# Allegro board tc358870_demo.brd
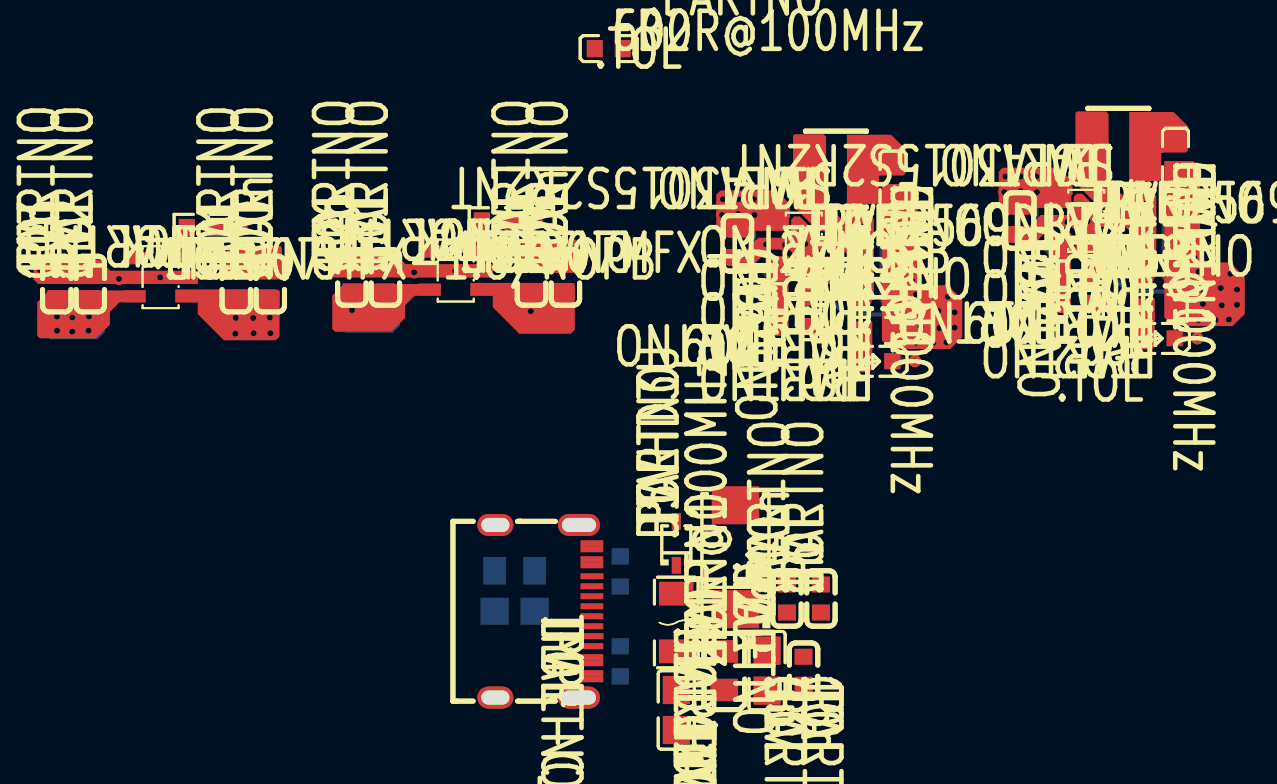
[diagram p0: board, top side]
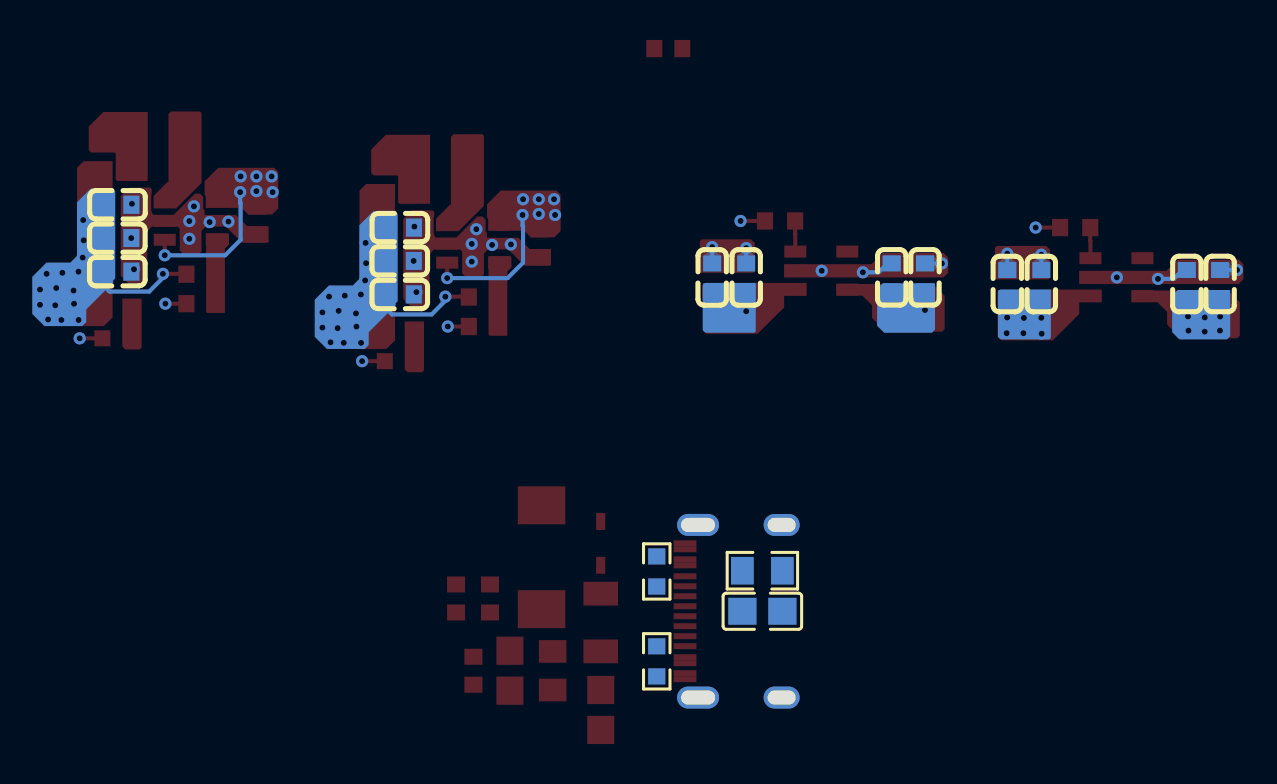
[diagram p1: board, bottom side, seen from below]

No outline. copper layers: TOP, GND, PWOER, BOTTOM. Coordinates in mm from the lowest, leftmost part position.

## Design rules (mm)
constraint set DEFAULT: min track width 0.203
net group MIPI_DIS1: nets MIPI_DSI1_CLK_N MIPI_DSI1_CLK_P MIPI_DSI1_DATA0_N MIPI_DSI1_DATA0_P MIPI_DSI1_DATA1_N MIPI_DSI1_DATA1_P MIPI_DSI1_DATA2_N MIPI_DSI1_DATA2_P MIPI_DSI1_DATA3_N MIPI_DSI1_DATA3_P
net group MIPI_DSI0: nets MIPI_DSI0_CLK_N MIPI_DSI0_CLK_P MIPI_DSI0_DATA0_N MIPI_DSI0_DATA0_P MIPI_DSI0_DATA1_N MIPI_DSI0_DATA1_P MIPI_DSI0_DATA2_N MIPI_DSI0_DATA2_P MIPI_DSI0_DATA3_N MIPI_DSI0_DATA3_P

## Placement (name value [footprint] x y rotation side)
C1  4u7  [C0805]  30.98 0 270 top
C2  47uF  [CASE-C]  33.94 7.65 270 top
C3  4u7  [C0805]  35.52 1.97 270 top
C4  100n  [C0603]  36.51 5.58 90 top
C5  10n  [C0603]  37.34 1.97 270 top
C6  1n  [C0603]  38.21 5.58 90 top
C7  4u7  [C0805]  22.9 4.94 180 bottom
C8  1n  [C0603]  8.95 21.32 90 bottom
C9  10n  [C0603]  10.65 21.32 90 bottom
C10  100n  [C0603]  10.68 21.32 90 top
C11  10u  [C0603]  8.98 21.32 90 top
C12  1n  [C0603]  1.68 21.32 90 top
C13  10n  [C0603]  0 21.32 90 top
C14  100n  [C0603]  1.67 21.33 90 bottom
C15  10u  [C0603]  0.01 21.33 90 bottom
C16  4u7  [C0603]  34.04 23.36 270 top
C17  1n  [C0603]  41.03 24.16 180 top
C18  10n  [C0603]  41.03 22.48 180 top
C19  100n  [C0603]  41.03 20.8 180 top
C20  10u  [C0603]  41.02 24.15 180 bottom
C21  10u  [C0603]  41.03 22.48 180 bottom
C22  22u  [C0603]  41.03 20.8 180 bottom
C23  10n  [C0603]  25.41 21.65 90 bottom
C24  100n  [C0603]  25.44 21.65 90 top
C25  10u  [C0603]  23.73 21.65 90 top
C26  10n  [C0603]  14.76 21.65 90 top
C27  100n  [C0603]  16.43 21.66 90 bottom
C28  10u  [C0603]  14.77 21.66 90 bottom
C29  4u7  [C0603]  48.16 24.5 270 top
C30  1n  [C0603]  23.7 21.65 90 bottom
C31  1n  [C0603]  16.43 21.65 90 top
C32  1n  [C0603]  55.15 25.3 180 top
C33  10n  [C0603]  55.15 23.62 180 top
C34  100n  [C0603]  55.15 21.94 180 top
C35  10u  [C0603]  55.14 25.29 180 bottom
C36  10u  [C0603]  55.15 23.62 180 bottom
C37  22u  [C0603]  55.15 21.94 180 bottom
D1  H5VHD3U  [SOD-323]  30.98 8.34 90 top
F1  SMD1206-100-30  [PTC1206]  30.98 4.38 270 top
FB1  220R@100MHz  [FB0805]  33.38 1.97 90 top
FB2  600R@100MHz  [FB0603]  27.6 33.11 0 top
FB3  600R@100MHz  [FB0603]  41.82 26.55 270 top
FB4  600R@100MHz  [FB0603]  55.94 27.7 270 top
L1  SWPA3015S2R2NT  [SMD3015]  38.96 27.07 180 top
L2  SWPA3015S2R2NT  [SMD3015]  53.09 28.21 180 top
LED1  Red  [LED0603]  41.03 17.46 180 top
LED2  Red  [LED0603]  55.15 18.6 180 top
R1  1M  [R0805]  22.9 6.97 180 bottom
R2  5K11  [R0603]  28.18 6.94 90 bottom
R3  5K11  [R0603]  28.18 2.43 270 bottom
R4  10K  [R0603]  7.25 24.15 180 top
R5  41K2  [R0603]  36.82 20.67 0 top
R6  1K  [R0603]  41.02 18.99 180 top
R7  9K09  [R0603]  36.82 19.2 180 top
R8  10K  [R0603]  22.01 24.48 180 top
R9  7K68  [R0603]  50.94 21.82 0 top
R10  1K  [R0603]  55.14 20.14 180 top
R11  9K09  [R0603]  50.94 20.34 180 top
U1  TYPE-C_16PIN  [TYPEC_16PIN]  24.35 4.94 270 top
U2  TLV62569DBV  [SOT-23-5]  37.36 23.34 0 top
U3  LP5907MFX-1.8/NOPB  [SOT-23-5]  5.19 21.67 0 top
U4  TLV62569DBV  [SOT-23-5]  51.48 24.49 0 top
U5  LP5907MFX-1.2/NOPB  [SOT-23-5]  19.95 22 0 top

## Library data of the parts
C1 C3-C37 = CAP_NP: Tolerance: .TOL; User Part Number: .PARTNO
C2 = CAP_TANTALUM: Tolerance: .TOL; User Part Number: .PARTNO
D1 = TVS/ESD: Tolerance: .TOL; User Part Number: .PARTNO
F1 = Fuse: Tolerance: .TOL; User Part Number: .PARTNO
FB1-FB4 = FerriteBead: Tolerance: .TOL; User Part Number: .PARTNO
L1 L2 = Inductor: Tolerance: .TOL; User Part Number: .PARTNO
LED1 LED2 = LED: Tolerance: .TOL; User Part Number: .PARTNO
R1-R11 = Res: Tolerance: .TOL; User Part Number: .PARTNO
U1 = TYPEC_16PIN: Tolerance: .TOL; User Part Number: .PARTNO
U2 U4 = TLV62569DBV: Tolerance: .TOL; User Part Number: .PARTNO
U3 U5 = LP5907MFX: Tolerance: .TOL; User Part Number: .PARTNO

## Footprints (pads in the part's own frame, mm; a bottom-side part is the same pattern mirrored in y, then rotated)
C0603
  rect 0.8x0.9 smd: 1(-0.7,0) 2(0.7,0)
C0805
  rect 1.41x1.35 smd: 1(-1,0) 2(1,0)
CASE-C
  rect 1.9x2.376 smd: 1(2.6,0) 2(-2.6,0)
FB0603
  rect 0.8x0.864 smd: 1(-0.7,0) 2(0.7,0)
FB0805
  rect 1.133x1.377 smd: 1(-0.966,0) 2(0.966,0)
LED0603
  rect 0.8x0.8 smd: 1(-0.749,0) 2(0.749,0)
PTC1206
  rect 1.19x1.728 smd: 1(-1.445,0) 2(1.445,0)
R0603
  rect 0.806x0.864 smd: 1(-0.753,0) 2(0.753,0)
R0805
  rect 1.133x1.377 smd: 1(-1,0) 2(1,0)
SMD3015
  rect 1.5x3.32 smd: 1(1.328,0) 2(-1.328,0)
SOD-323
  rect 0.845x0.455 smd: 1(-1.098,0) 2(1.098,0)
SOT-23-5
  rect 1.1x0.6 smd: 1(1.3,-0.95) 2(1.3,0) 3(1.3,0.95) 4(-1.3,0.95) 5(-1.3,-0.95)
TYPEC_16PIN
  oval 1.1x1.8 hole 0.7x1.4: 1(-4.32,-2.416) 3(4.32,-2.416)
  oval 1.1x2.1 hole 0.7x1.7: 2(-4.32,1.764) 4(4.32,1.764)
  rect 0.3x1.14 smd: A1(-3.4,2.415) A4(-2.6,2.415) A5(-1.25,2.415) A6(-0.25,2.415) A7(0.25,2.415) A8(1.25,2.416) A9(2.6,2.415) A12(3.4,2.415) B1(3.1,2.415) B4(2.3,2.415) B5(1.75,2.415) B6(0.75,2.415) B7(-0.75,2.415) B8(-1.75,2.416) B9(-2.3,2.415) B12(-3.1,2.415)

## Nets
GND: C12.2 C13.2 C14.2 C15.2 C26.2 C27.2 C28.2 C31.2 FB2.2 U3.2 U5.2
PGND: C1.2 C2.2 C3.2 C4.2 C5.2 C6.2 C7.1 C8.2 C9.2 C10.2 C11.2 C16.2 C17.2 C18.2 C19.2 C20.2 C21.2 C22.2 C23.2 C24.2 C25.2 C29.2 C30.2 C32.2 C33.2 C34.2 C35.2 C36.2 C37.2 D1.2 FB2.1 LED1.1(CATHODE) LED2.1(CATHODE) R1.1 R2.2 R3.2 R7.1 R11.1 U1.A1 U1.A12 U1.B1 U1.B12 U2.2 U4.2
VCC_1V1: C32.1 C33.1 C34.1 C35.1 C36.1 C37.1 FB4.2 R9.2 R10.1
VCC_1V2: C26.1 C27.1 C28.1 C31.1 U5.5(OUT)
VCC_1V8: C12.1 C13.1 C14.1 C15.1 U3.5(OUT)
VCC_3V3: C8.1 C9.1 C10.1 C11.1 C17.1 C18.1 C19.1 C20.1 C21.1 C22.1 C23.1 C24.1 C25.1 C30.1 FB3.2 R4.1 R5.2 R6.1 R8.1 U3.1 U5.1
VCC_5V: C2.1 C3.1 C4.1 C5.1 C6.1 C16.1 C29.1 FB1.2 U2.1 U2.4(VIN) U4.1 U4.4(VIN)
N236681: D1.1(CATHODE) F1.1 U1.A4 U1.A9 U1.B4(VBUS_3) U1.B9
N236693: C1.1 F1.2 FB1.1
N236737: C7.2 R1.2 U1.1 U1.2 U1.3 U1.4
N236965: R2.1 U1.A5
N237015: R3.1 U1.B5
N238261: L1.1 U2.3
N238489: R5.1 R7.2 U2.5
N242953: L2.1 U4.3
N243181: R9.1 R11.2 U4.5
N2381410: FB3.1 L1.2
N2382151: LED1.2 R6.2
N2390621: R4.2 U3.3
N2428410: FB4.1 L2.2
N2429111: LED2.2 R10.2
N2437651: R8.2 U5.3

Pads without a net: U1 A6 A7 A8 B6 B7 B8; U3 4; U5 4

## Via types
v1: diameter 0.61, hole 0.305, TOP to BOTTOM, 92 vias

## Routing (per net, layer and track width the routed paths; a pad name or vN(x,y) marks a point on that pad's centre or on a via; arc(x,y) is an arc through that point)
GND: length 7.6
  TOP w0.203: v1(19.93,21.99) 19.94,22 U5.2 ; U3.2 5.18,21.67 v1(5.17,21.66)
  BOTTOM w0.203: C27.2 16.64,22.36 17.08,21.91 v1(17.87,21.91) ; C28.2 v1(13.92,22.36) ; C15.2 v1(-0.84,22.03) ; v1(3.11,21.58) 2.33,21.58 1.88,22.03 C14.2
PGND: length 11.7
  TOP w0.203: v1(37.43,23.33) 37.44,23.34 U2.2 ; v1(10.65,22.84) 10.68,22.81 C10.2 ; v1(25.41,23.17) 25.44,23.14 C24.2 ; R11.1 v1(52.75,20.34) ; U4.2 51.56,24.49 v1(51.55,24.48) ; LED2.1 v1(57.03,18.6) ; LED1.1 v1(42.91,17.46) ; R7.1 v1(38.63,19.2)
  BOTTOM w0.203: C8.2 v1(8.95,22.79) ; C9.2 v1(10.65,22.84) ; C18.2 v1(40.34,22.48) ; C23.2 v1(25.41,23.17) ; C30.2 v1(23.7,23.12) ; C33.2 v1(54.46,23.62)
  vias: v1(35.47,23.31) v1(36.41,23.28) v1(37.2,24.07) v1(37.43,22.44) v1(40.2,20.92) v1(40.3,24.2) v1(49.59,24.45) v1(50.53,24.42) v1(51.32,25.21) v1(51.55,23.59) v1(54.32,22.06) v1(54.42,25.34)
VCC_1V1: length 6.7
  TOP w0.203: R9.2 51.72,21.83 v1(52.87,21.83)
  BOTTOM w0.203: v1(57.1,21.94) C34.1 55.85,21.26 55.54,20.94 53.56,20.94 52.87,21.63 v1(52.87,21.83)
  vias: v1(56.86,24.53) v1(56.83,23.51) v1(56.88,22.65) v1(57.09,19.52) v1(57.32,20.34) v1(57.34,21) v1(57.9,21.88) v1(57.95,19.52) v1(58.21,21.12) v1(58.26,20.26) v1(58.61,19.55) v1(58.69,21.83) v1(59.02,21.05) v1(59.02,20.28)
VCC_1V2: length 0.9
  BOTTOM w0.203: C28.1 v1(14.77,20.02)
VCC_1V8: length 0.9
  BOTTOM w0.203: C15.1 v1(0.01,19.69)
  vias: v1(0.01,18.99) v1(0.78,19.65) v1(0.78,18.94) v1(1.61,19.7) v1(1.59,18.99)
VCC_3V3: length 11.1
  TOP w0.203: v1(38.75,20.69) 37.59,20.69 R5.2 ; R4.1 v1(9.23,24.15) ; R8.1 v1(23.99,24.48)
  BOTTOM w0.203: C30.1 v1(23.7,19.96) ; v1(42.97,20.8) C19.1 41.73,20.11 41.42,19.8 39.43,19.8 38.75,20.49 v1(38.75,20.69) ; C8.1 v1(8.95,19.63)
  vias: v1(8.93,18.84) v1(9.82,19.62) v1(9.84,18.86) v1(10.66,19.65) v1(10.68,18.86) v1(42.71,22.37) v1(42.74,23.38) v1(42.76,21.5) v1(42.97,18.38) v1(43.22,19.85) v1(43.19,19.19) v1(43.78,20.74) v1(43.83,18.38) v1(44.08,19.98) v1(44.13,19.12) v1(44.49,18.4) v1(44.57,20.69) v1(44.9,19.9) v1(44.9,19.14)
VCC_5V: length 15.1
  TOP w0.203: 47.28,26.91 47.28,26.86 v1(47.44,26.71) ; U4.1 v1(52.78,22.76) ; v1(33.31,25.57) 33.16,25.72 33.16,25.77 ; U2.1 v1(38.66,21.62)
  BOTTOM w0.203: v1(52.78,22.76) 49.76,22.76 48.99,23.54 48.99,25.36 49.01,25.39 v1(49.01,25.92) ; v1(34.89,24.78) 34.89,24.25 34.86,24.22 34.86,22.39 35.63,21.62 v1(38.66,21.62)
  vias: v1(33.26,24.78) v1(34.08,25.57) v1(34.08,24.83) v1(34.86,25.57) v1(47.38,25.92) v1(48.2,26.71) v1(48.2,25.97) v1(48.99,26.71)
N2390621: length 1.5
  TOP w0.203: U3.3 6.49,23.48 6.5,23.49 R4.2
N2437651: length 1.5
  TOP w0.203: U5.3 21.25,23.81 21.26,23.82 R8.2

## Copper pours and planes (outline as drawn; the poured copper is in the pictures)
GND on TOP (solid shape): 2.68,21.99 7.02,21.99 7.05,21.96 7.05,21.33 -0.93,21.33 -1.15,21.55 -1.15,22.32 -0.93,22.54 2.12,22.54
GND on TOP (solid shape): 17.44,22.32 21.78,22.32 21.81,22.29 21.81,21.66 13.83,21.66 13.6,21.88 13.6,22.65 13.83,22.88 16.88,22.88
PGND on TOP (solid shape): 11.27,23.13 11.27,21.61 11.22,21.55 8.57,21.55 8.52,21.61 8.52,23.05 8.7,23.23 11.16,23.23
PGND on TOP (solid shape): 26.02,23.46 26.02,21.94 25.97,21.88 23.33,21.88 23.28,21.94 23.28,23.38 23.46,23.56 25.92,23.56
PGND on TOP (solid shape): 40.86,24.58 40.86,20.59 40.45,20.18 39.82,20.18 39.54,20.46 39.54,22.82 39.31,23.05 38.01,23.05 37.91,22.95 37.91,21.86 37.76,21.71 36.92,21.71 36.82,21.81 36.82,22.85 36.62,23.05 35.6,23.05 34.79,22.24 33.52,22.24 33.47,22.29 33.47,23.05 33.49,23.08 34.53,23.08 35.09,23.64 36.67,23.64 36.67,23.88 36.69,23.89 36.72,23.94 36.73,23.99 36.73,24.54 36.89,24.7 37.15,24.7 38.22,23.64 39.21,23.64 39.31,23.74 39.31,23.84 39.33,23.84 39.33,23.99 39.33,24.59 39.33,24.65 39.31,24.68 39.31,24.93 39.38,25.01 40.43,25.01
PGND on TOP (solid shape): 54.98,25.72 54.98,21.73 54.57,21.33 53.94,21.33 53.66,21.61 53.66,23.97 53.43,24.2 52.13,24.2 52.03,24.09 52.03,23 51.88,22.85 51.04,22.85 50.94,22.95 50.94,23.99 50.74,24.2 49.72,24.2 48.91,23.38 47.64,23.38 47.59,23.43 47.59,24.2 47.61,24.22 48.65,24.22 49.21,24.78 50.79,24.78 50.79,25.02 50.81,25.04 50.84,25.08 50.86,25.14 50.86,25.69 51.02,25.85 51.27,25.85 52.34,24.78 53.33,24.78 53.43,24.88 53.43,24.98 53.46,24.98 53.46,25.14 53.46,25.74 53.46,25.8 53.43,25.82 53.43,26.08 53.51,26.15 54.55,26.15
VCC_1V1 on TOP (solid shape): 57.16,27.14 57.16,22.72 57.49,22.39 58.69,22.39 59.4,21.68 59.4,19.83 58.79,19.22 55.82,19.22 55.39,19.65 55.39,27.47 56.83,27.47
VCC_1V1 on BOTTOM (solid shape): 57.16,25.42 57.16,22.72 57.49,22.39 58.69,22.39 59.4,21.68 59.4,19.83 58.79,19.22 56.91,19.22 56.71,19.42 56.71,20.06 55.36,21.4 55.36,21.5 55.26,21.61 55.26,25.97 55.39,26.1 56.48,26.1
VCC_1V2 on TOP (solid shape): 19.19,20.77 19.17,20.74 17.9,20.74 17.41,20.26 17.41,19.62 16.73,18.94 13.91,18.94 13.78,19.07 13.78,20.74 14.36,21.33 19.19,21.33
VCC_1V2 on BOTTOM (solid shape): 17.16,21.07 17.16,19.24 16.8,18.89 14.42,18.89 14.26,19.04 14.26,21.35 16.88,21.35
VCC_1V8 on TOP (solid shape): 4.43,20.44 4.41,20.41 3.14,20.41 2.66,19.93 2.66,19.29 1.97,18.61 -0.85,18.61 -0.98,18.73 -0.98,20.41 -0.39,21 4.43,21
VCC_1V8 on BOTTOM (solid shape): 2.4,20.74 2.4,18.91 2.05,18.56 -0.34,18.56 -0.49,18.71 -0.49,21.02 2.12,21.02
VCC_3V3 on TOP (solid shape): 11.14,20.92 11.14,18.71 10.94,18.51 8.37,18.51 7.05,19.83 7.05,20.41 5.93,20.41 5.93,21.05 11.01,21.05
VCC_3V3 on TOP (solid shape): 25.9,21.25 25.9,19.04 25.69,18.84 23.13,18.84 21.81,20.16 21.81,20.74 20.69,20.74 20.69,21.38 25.77,21.38
VCC_3V3 on TOP (solid shape): 43.04,26 43.04,21.58 43.37,21.25 44.57,21.25 45.28,20.54 45.28,18.68 44.67,18.07 41.7,18.07 41.26,18.51 41.26,26.33 42.71,26.33
VCC_3V3 on BOTTOM (solid shape): 11.11,20.92 11.11,18.68 10.99,18.56 8.55,18.56 8.47,18.63 8.47,21.05 10.99,21.05
VCC_3V3 on BOTTOM (solid shape): 25.87,21.25 25.87,19.01 25.74,18.89 23.31,18.89 23.23,18.96 23.23,21.38 25.74,21.38
VCC_3V3 on BOTTOM (solid shape): 43.04,24.27 43.04,21.58 43.37,21.25 44.57,21.25 45.28,20.54 45.28,18.68 44.67,18.07 42.79,18.07 42.58,18.28 42.58,18.91 41.24,20.26 41.24,20.36 41.14,20.46 41.14,24.83 41.26,24.96 42.36,24.96
VCC_5V on TOP (solid shape): 36.67,25.31 36.67,24.65 36.54,24.53 36.54,23.99 34.81,23.99 34.48,23.66 33.29,23.66 32.98,23.97 32.98,25.8 33.19,26 35.98,26
VCC_5V on TOP (solid shape): 50.79,26.46 50.79,25.8 50.66,25.67 50.66,25.14 48.93,25.14 48.6,24.81 47.41,24.81 47.11,25.11 47.11,26.94 47.31,27.14 50.1,27.14
(no net) on TOP: 5.93,21.05 11.01,21.05 11.14,20.92 11.14,18.71 10.94,18.51 8.37,18.51 7.05,19.83 7.05,20.41 5.93,20.41
(no net) on TOP: 40.86,20.59 40.86,24.58 40.43,25.01 39.38,25.01 39.31,24.93 39.31,23.74 39.21,23.64 38.22,23.64 37.15,24.7 36.89,24.7 36.67,24.48 36.67,23.64 35.09,23.64 34.53,23.08 33.49,23.08 33.47,23.05 33.47,22.29 33.52,22.24 34.79,22.24 35.6,23.05 36.62,23.05 36.82,22.85 36.82,21.81 36.92,21.71 37.76,21.71 37.91,21.86 37.91,22.95 38.01,23.05 39.31,23.05 39.54,22.82 39.54,20.46 39.82,20.18 40.45,20.18
(no net) on TOP: 39.51,28.79 41.72,28.79 42.46,28.06 42.46,26.89 42.33,26.76 41.16,26.76 41.11,26.71 41.11,25.42 41.03,25.34 39.54,25.34 39.51,25.36
(no net) on TOP: 7.05,21.33 -0.93,21.33 -1.15,21.55 -1.15,22.32 -0.93,22.54 2.12,22.54 2.68,21.99 7.02,21.99 7.05,21.96
(no net) on TOP: 35.65,18.73 35.65,21.96 35.45,22.16 35.45,22.67 35.5,22.72 36.59,22.72 36.59,18.79 36.54,18.73
(no net) on TOP: 8.52,21.61 8.52,23.05 8.7,23.23 11.16,23.23 11.27,23.13 11.27,21.61 11.22,21.55 8.57,21.55
(no net) on TOP: 39.82,19.45 39.82,17.01 39.92,16.91 40.63,16.91 40.78,17.06 40.78,19.45
(no net) on TOP: 41.26,26.33 41.26,18.51 41.7,18.07 44.67,18.07 45.28,18.68 45.28,20.54 44.57,21.25 43.37,21.25 43.04,21.58 43.04,26 42.71,26.33
(no net) on TOP: 4.43,21 -0.39,21 -0.98,20.41 -0.98,18.73 -0.85,18.61 1.97,18.61 2.66,19.29 2.66,19.93 3.14,20.41 4.41,20.41 4.43,20.44
(no net) on TOP: 38.09,23.97 36.82,25.24 36.82,28.74 36.89,28.82 38.34,28.82 38.47,28.69 38.47,25.29 38.52,25.29 39.21,24.6 39.21,23.97
(no net) on TOP: 36.67,23.99 34.81,23.99 34.48,23.66 33.29,23.66 32.98,23.97 32.98,25.8 33.19,26 35.98,26 36.67,25.31
(no net) on BOTTOM: 8.47,21.05 10.99,21.05 11.11,20.92 11.11,18.68 10.99,18.56 8.55,18.56 8.47,18.63
(no net) on BOTTOM: -0.49,21.02 2.12,21.02 2.4,20.74 2.4,18.91 2.05,18.56 -0.34,18.56 -0.49,18.71
(no net) on BOTTOM: 41.24,20.36 41.24,20.26 42.58,18.91 42.58,18.28 42.79,18.07 44.67,18.07 45.28,18.68 45.28,20.54 44.57,21.25 43.37,21.25 43.04,21.58 43.04,24.27 42.36,24.96 41.26,24.96 41.14,24.83 41.14,20.46
N238261 on TOP (solid shape): 38.47,28.69 38.47,25.29 38.52,25.29 39.21,24.6 39.21,23.97 38.09,23.97 36.82,25.24 36.82,28.74 36.89,28.82 38.34,28.82
N238489 on TOP (solid shape): 36.59,18.79 36.54,18.73 35.65,18.73 35.65,21.96 35.45,22.16 35.45,22.67 35.5,22.72 36.59,22.72
N242953 on TOP (solid shape): 52.59,29.83 52.59,26.43 52.64,26.43 53.33,25.75 53.33,25.11 52.21,25.11 50.94,26.38 50.94,29.89 51.02,29.96 52.46,29.96
N243181 on TOP (solid shape): 50.71,19.93 50.66,19.88 49.77,19.88 49.77,23.1 49.57,23.31 49.57,23.81 49.62,23.87 50.71,23.87
N2381410 on TOP (solid shape): 42.46,28.06 42.46,26.89 42.33,26.76 41.16,26.76 41.11,26.71 41.11,25.42 41.03,25.34 39.54,25.34 39.51,25.36 39.51,28.79 41.72,28.79
N2382151 on TOP (solid shape): 40.78,17.06 40.63,16.91 39.92,16.91 39.82,17.01 39.82,19.45 40.78,19.45
N2428410 on TOP (solid shape): 56.58,29.2 56.58,28.03 56.45,27.9 55.28,27.9 55.23,27.85 55.23,26.56 55.16,26.48 53.66,26.48 53.63,26.51 53.63,29.94 55.84,29.94
N2429111 on TOP (solid shape): 54.9,18.2 54.75,18.05 54.04,18.05 53.94,18.15 53.94,20.59 54.9,20.59

Small or netless copper shapes (teardrops, artwork), in the pictures only: 24 on TOP, 25 on BOTTOM
